# EAGLE board arduino_semaphore_ (EAGLE 6.2)
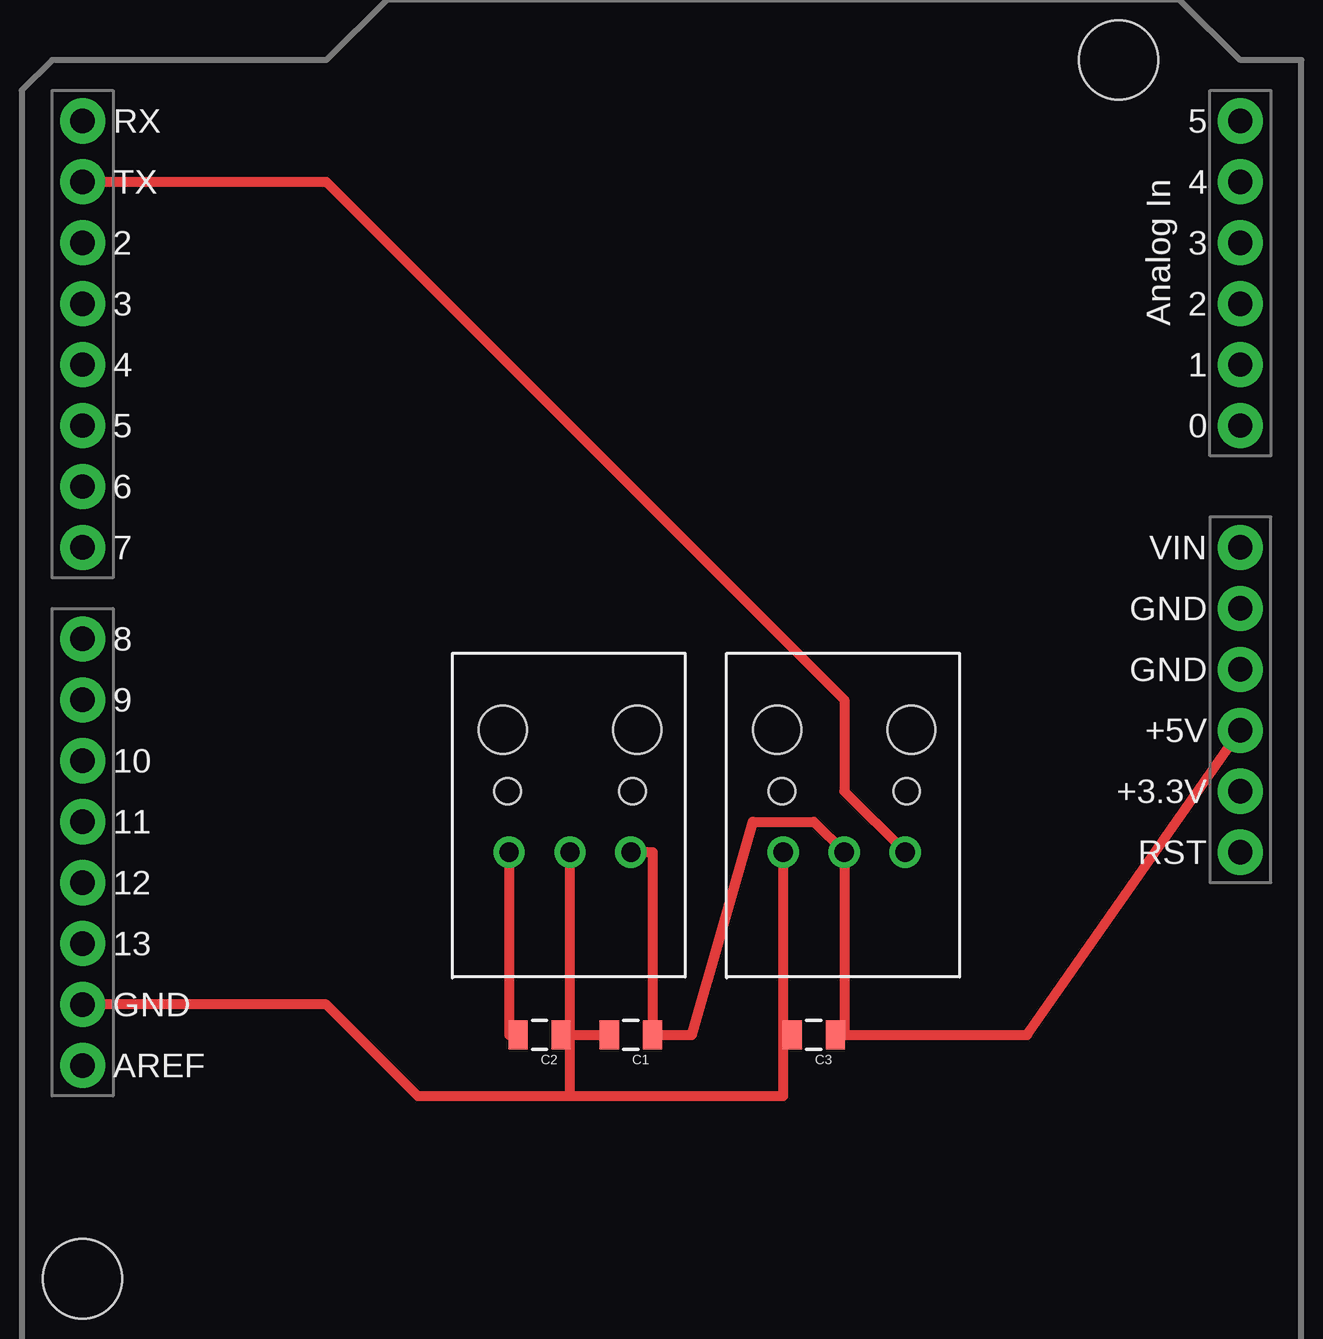
[diagram p0: board, top side]
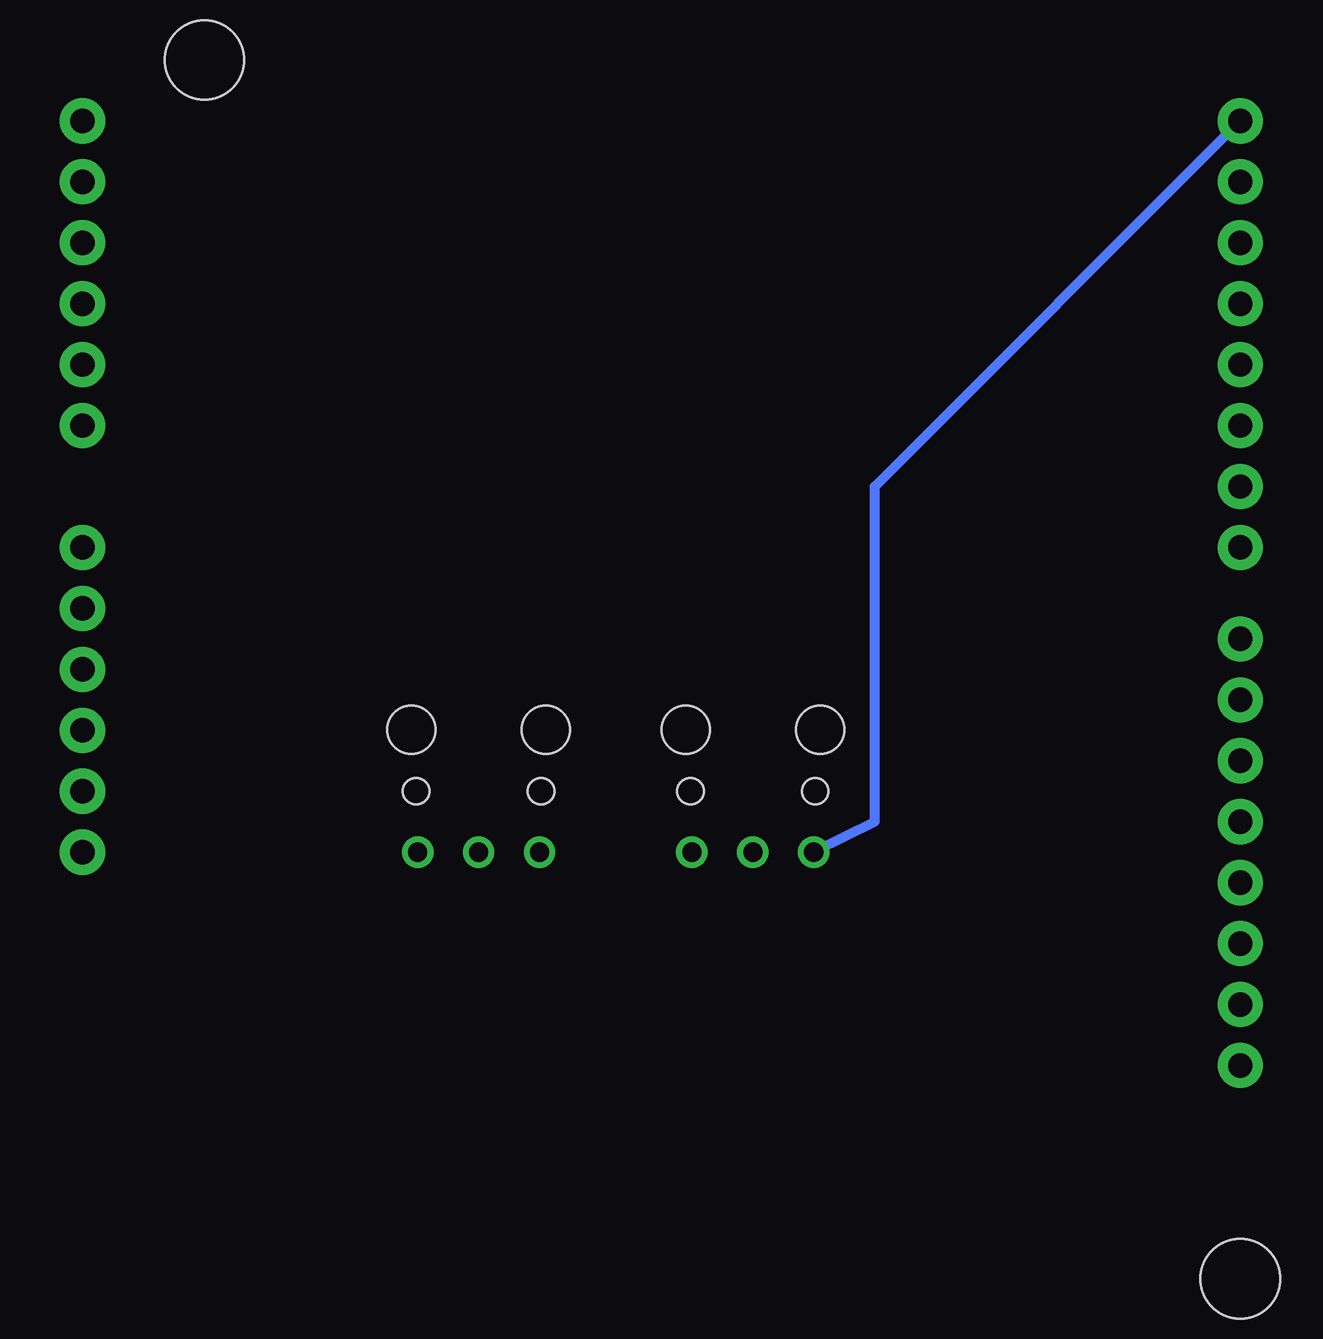
[diagram p1: board, bottom side, seen from below]

No outline drawn. Coordinates in mm, seen from the top.
Copper layers (1*16): Top 0.035mm / dielectric 1.5mm / Bottom 0.035mm
Design rules: minimum track width 10mil, minimum drill 24mil, track to track 8mil, track to pad 8mil, pad to pad 8mil, via to via 8mil, smd to smd 8mil, copper to edge 40mil, drill to drill 8mil, minimum pad ring 10mil, minimum via ring 8mil, stop-mask expansion 4mil, vias tented up to drill 0mil, thermal gap 10mil

## Footprints (pad centres in the part's own frame; a part is rotated, then mirrored left to right if it is on the bottom)
0805 = smd 0.8 x 1.2: 1 -0.9,0; 2 0.9,0
DUEMILANOVE_SHIELD = drill 1.016 pad 1.88: 3.3V 50.8,26.67; 5V 50.8,29.21; A0 50.8,41.91; A1 50.8,44.45; A2 50.8,46.99; A3 50.8,49.53; A4 50.8,52.07; A5 50.8,54.61; AREF 2.54,15.24; D2 2.54,49.53; D3 2.54,46.99; D4 2.54,44.45; D5 2.54,41.91; D6 2.54,39.37; D7 2.54,36.83; D8 2.54,33.02; D9 2.54,30.48; D10 2.54,27.94; D11 2.54,25.4; D12 2.54,22.86; D13 2.54,20.32; GND@0 50.8,31.75; GND@1 50.8,34.29; GND@2 2.54,17.78; RES 50.8,24.13; RX 2.54,54.61; TX 2.54,52.07; VIN 50.8,36.83 | hole 3.302: 45.72,57.15; 2.54,6.35
DLR = drill 0.8: GND 0,0; VCC 0,-2.54; VOUT 0,2.54 | hole 1.1: 2.54,2.6; 2.54,-2.6 | hole 2: 5.1,2.8; 5.1,-2.8
DLT = drill 0.8: GND 0,2.54; VCC 0,0; VIN 0,-2.54 | hole 1.1: 2.54,2.6; 2.54,-2.6 | hole 2: 5.1,2.8; 5.1,-2.8

## Placement (x,y rotation side)
C1  0.1uF  [0805]  25.4,16.51 180 top
C2  30pF  [0805]  21.59,16.51 180 top
C3  0.1uF  [0805]  33.02,16.51 180 top
U1  ARDUINO_SHIELDLABEL  [DUEMILANOVE_SHIELD]  0,0 0 top
U$1  DLR1160  [DLR]  22.86,24.13 90 top
U$2  DLT1160  [DLT]  34.29,24.13 90 top

## Library data of the parts
C1-C3 = SparkFun-Passives
U1 = SparkFun-Boards
U$1 U$2 = TOS

## Nets
N$2: C2.2 U1.RX U$1.VOUT
N$4: C1.1 C3.1 U1.5V U$1.VCC U$2.VCC
N$5: C1.2 C2.1 C3.2 U1.GND@2 U$1.GND U$2.GND
N$6: U1.TX U$2.VIN

## Tracks (layer width: path | path; a pad name or v marks a point on that pad's centre or on a via)
N$2
  Top 0.406: U$1.VOUT 20.32,16.51 C2.2
  Bottom 0.406: U1.RX 17.78,39.37 17.78,25.4 U$1.VOUT
N$4
  Top 0.406: U$1.VCC 26.3,24.13 C1.1 27.94,16.51 30.48,25.4 33.02,25.4 U$2.VCC 34.29,16.51 | 34.29,16.51 C3.1 | 34.29,16.51 41.91,16.51 U1.5V
N$5
  Top 0.406: 22.86,13.97 16.51,13.97 12.7,17.78 U1.GND@2 | 22.86,13.97 22.86,16.51 | 22.86,16.51 U$1.GND | 22.86,16.51 C1.2 | 22.86,13.97 31.75,13.97 31.75,16.51 | 31.75,16.51 U$2.GND | C2.1 22.86,16.51 | C3.2 31.75,16.51
N$6
  Top 0.406: U$2.VIN 34.29,26.67 34.29,30.48 12.7,52.07 U1.TX